# Altium PCB Telit-GPS-SL871-Module-V1.1.PcbDoc
Units mm, origin at the board's own origin, x right, y up, seen from the top; angles counter-clockwise.
Board outline 29.9 x 35 mm, 2 copper layers (Top Layer, Bottom Layer); 16 components, 19 nets, 61 pads, 1 vias.
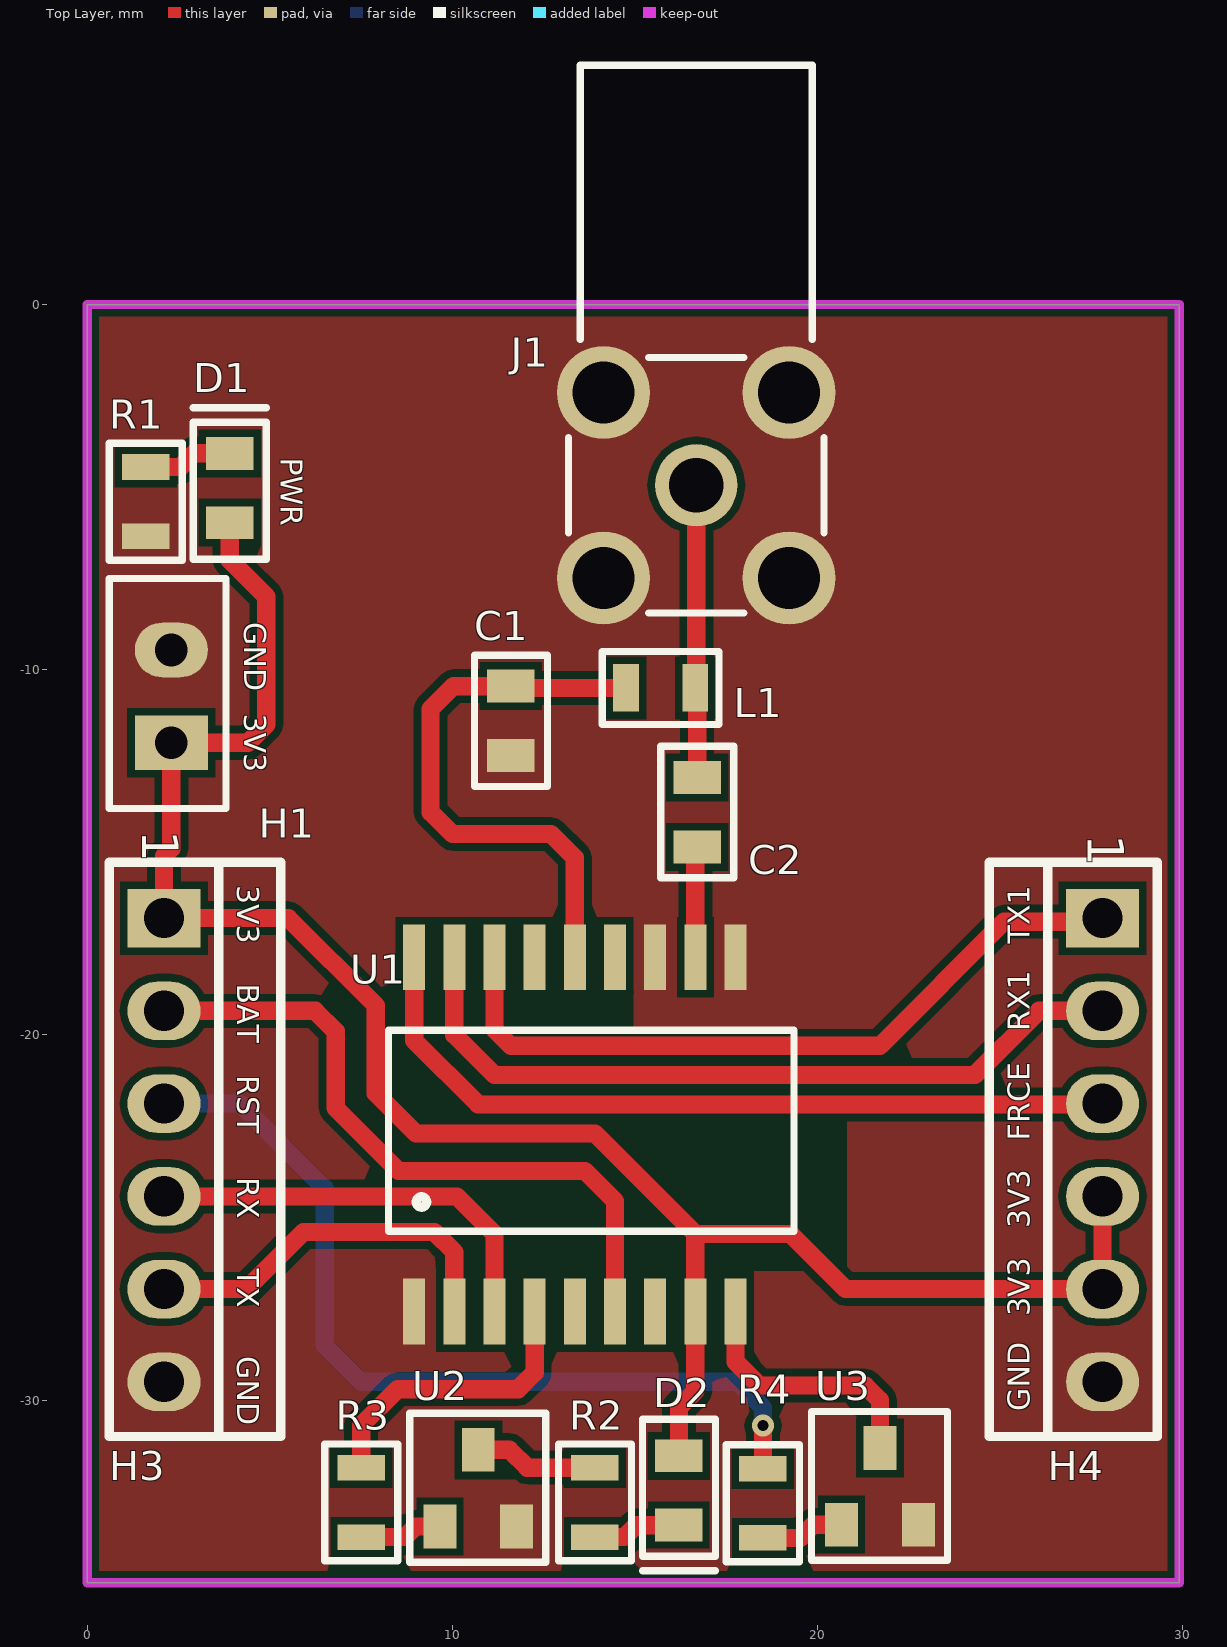
[diagram p0: Top Layer view]
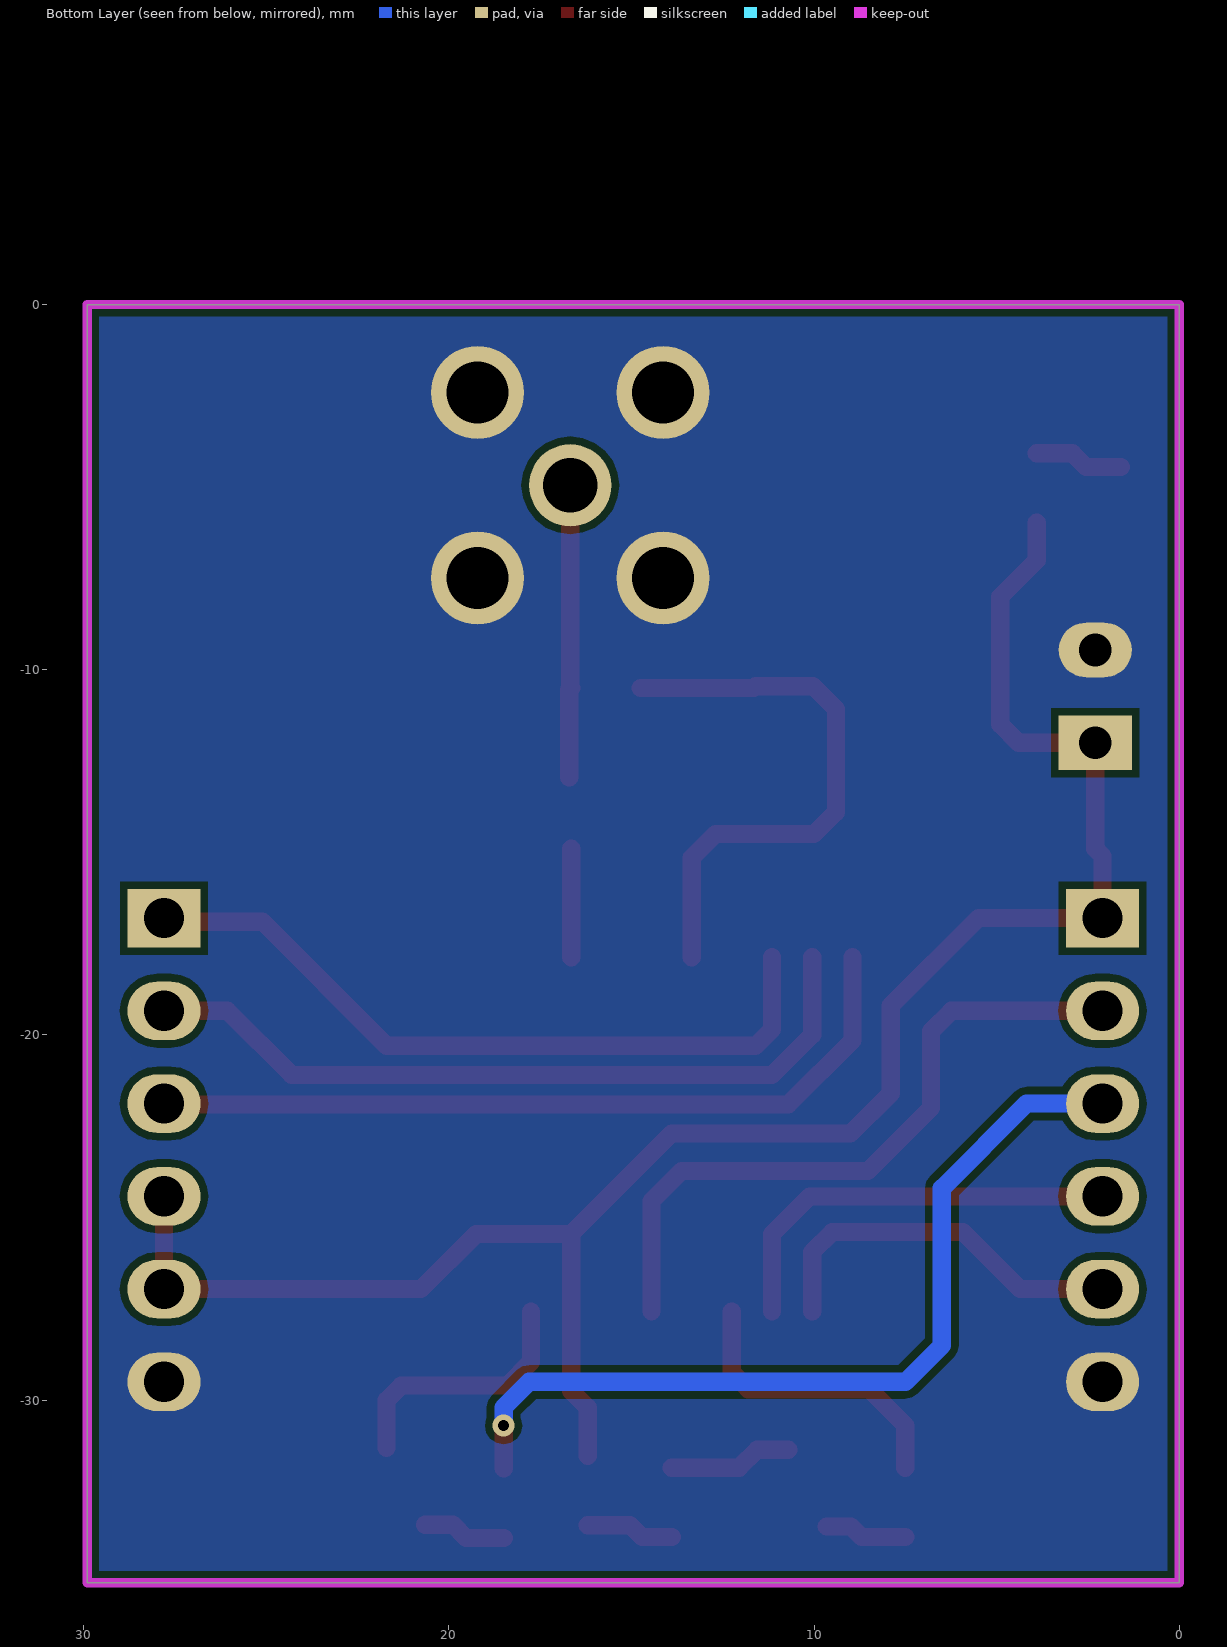
[diagram p1: Bottom Layer view, seen from below]

## Layer stack, top to bottom
Top Solder: solder mask 0.0102, Solder Resist, Dk 3.5
Top Layer: signal copper 0.0356
Dielectric 1: dielectric 0.32, FR-4, Dk 4.8
Bottom Layer: signal copper 0.0356
Bottom Solder: solder mask 0.0102, Solder Resist, Dk 3.5

## Board outline
0,0 29.9,0 29.9,-34.9 29.9,-35 0,-35

## Design rules (kind name [scope] priority, off if disabled: settings)
Clearance [All] p1: gap=0.2 ignorepadtopadclearanceinfootprint=FALSE
ComponentClearance [All] p1: gap=0.2 collisioncheckmode=3 verticalgap=0.2 showdistances=FALSE
HoleSize [All] p1: absolutevalues=TRUE maxlimit=4 minlimit=0.025 maxpercent=80.000 minpercent=20.000
HoleToHoleClearance [All] p1: gap=0.2 allowstackedmicrovias=TRUE
MinimumSolderMaskSliver [All] p1: minsoldermaskwidth=0.1
PlaneConnect [All] p1: planeconnectstyle=Direct reliefexpansion=0.508 reliefentries=4 reliefconductorwidth=0.254 reliefairgap=0.254
PolygonConnect [All] p1: connectstyle=Direct reliefconductorwidth=0.254 reliefentries=4 polygonreliefangle="90 Angle" airgapwidth=0.254
RoutingVias [All] p1: holewidth=0.3 width=0.6 viastyle="Through Hole" minholewidth=0.3 minwidth=0.6 maxholewidth=0.3 maxwidth=0.6
SilkToSilkClearance [All] p1: silktosilkclearance=0.1
SilkToSolderMaskClearance [IsPad] p1: minsilkscreentomaskgap=0.1 clearancetoexposedcopper=TRUE
SolderMaskExpansion [All] p1: expansion=0.1
Width [All] p1: maxlimit=0.5 minlimit=0.2 preferedwidth=0.3
23 further rules are at their usual default settings.

## Components (designator, comment, footprint, x,y, rotation, side; value= is the part's Value field where it differs from the comment)
C1 "33PF/10V/C0G/NP0" CAP0805 11.6,-11.4 r270 top
C2 "22PF/16V/C0G/NP0" CAP0805 16.7,-13.9 r90 top
D1 "RED" LED_0805 3.9,-5 r270 top
D2 "GREEN" LED_0805 16.2,-32.5 r90 top
H1 "2x1 Hdr" Hdr_Male_1x2_2.54mm 2.3,-12 r90 top
H3 "6x1 Hdr" Hdr_Female_1x6_2.54mm 2.1,-16.8 r0 top
H4 "6x1 Hdr" Hdr_Female_1x6_2.54mm 27.8,-16.8 r0 top
J1 "WR-SMA-THT" WR_SMA_THT_60311002114501 16.675,-4.95 r180 top
L1 "47nH" L0805 15.7,-10.5 r0 top
R1 "100R-1/8W" R0805 1.6,-5.4 r90 top
R2 "100R-1/8W" R0805 13.9,-32.8 r270 top
R3 "1k-1/8W" R0805 7.5,-32.8 r90 top
R4 "1k-1/8W" R0805 18.5,-32.825 r90 top
U1 "TELIT SL871" Telit_SL871 8.95,-27.575 r90 top
U2 "SBC846BLT1G" SOT-23 10.705,-32.412 r0 top
U3 "SBC846BLT1G" SOT-23 21.706,-32.362 r0 top

## Footprints (in the part's own frame and the unit in brackets; to place one, negate y for a bottom-side part, rotate by r counter-clockwise, add the part's x,y. Pads: shape width x height; smd on the part's side, far side on the other; paste and mask are expansions set on the pad)
CAP0805 [mm]
  rect 0.9x1.3 smd: 1(-0.95,0) 2(0.95,0)
  silkscreen extent -1.8,-1 1.8,1, body extent -1,-0.6 1,0.6, height 1.46
Hdr_Female_1x6_2.54mm [mm]
  rect 2x1.6 hole 1.1: 1(0,0)
  oval 2x1.6 hole 1.1: 2(0,-2.54) 3(0,-5.08) 4(0,-7.62) 5(0,-10.16) 6(0,-12.7)
  silkscreen extent -1.5,-14.2 1.5,1.52, body extent -1.25,-14.17 1.25,1.47, height 8.31
Hdr_Male_1x2_2.54mm [mm]
  rect 1.5x2 hole 0.9: 1(0,0)
  oval 1.5x2 hole 0.9: 2(2.54,0)
  silkscreen extent -1.8,-1.5 4.5,1.7, body extent -1.27,-1.27 3.81,1.27, height 9.5
L0805 [mm]
  rect 0.7x1.3 smd: 1(-0.95,0) 2(0.95,0)
  silkscreen extent -1.6,-1 1.6,1, body extent -1,-0.6 1,0.6, height 0.71
LED_0805 [mm]
  rect 0.9x1.3 smd: 1(0.975,0) 2(-0.925,0)
  silkscreen extent -2.17,-1 1.97,1, body extent -0.98,-0.45 1.08,0.46, height 0.85
R0805 [mm]
  rect 0.7x1.3 smd: 1(-0.95,0) 2(0.95,0)
  silkscreen extent -1.6,-1 1.6,1, body extent -1,-0.6 1,0.6, height 0.71
SOT-23 [mm]
  rect 0.9x1.2 smd mask+0.06: 1(-1.05,-1.05) 2(1.05,-1.05) 3(0,1.05)
  silkscreen extent -1.88,-2.03 1.85,2.05, body extent -1.42,-1.32 1.48,1.08, height 1.03
Telit_SL871 [mm]
  rect 1.8x0.6 smd: 1(0,0) 2(0,-1.1) 3(0,-2.2) 4(0,-3.3) 5(0,-4.4) 6(0,-5.5) 7(0,-6.6) 8(0,-7.7) 9(0,-8.8) 10(9.7,-8.8) 11(9.7,-7.7) 12(9.7,-6.6) 13(9.7,-5.5) 14(9.7,-4.4) 15(9.7,-3.3) 16(9.7,-2.2) 17(9.7,-1.1) 18(9.7,0)
  silkscreen extent 2.2,-10.4 7.7,0.7, body extent 0,-10.3 9.7,1.2, height 1.5
WR_SMA_THT_60311002114501 [mm] "SMA PCB THT Jack Right Angle"
  round 2.25 hole 1.5: 1(0,0)
  round 2.55 hole 1.7: 2(-2.54,2.54) 3(2.54,2.54) 4(2.54,-2.54) 5(-2.54,-2.54)
  silkscreen extent -3.5,-11.5 3.5,3.5, body extent -3.5,-11.5 3.5,3.5, height 9.7

## Part data
C1: library part 885012007003, "CAP CER 33PF 10V C0G/NP0 0805", Capacitance=33pF, Case/Package=0805, Case Code (Metric)=2012, Manufacturer="Wurth Electronics", Max Operating Temperature=125°C, Min Operating Temperature=-55°C, Supplier Part Number 1=732-7808-1-ND, Tolerance=5%, Voltage Rating=10V, Case Code (Imperial)=0805, Category=Capacitors, Length=0.079inch, Manufacturer Part Number=885012007003, Mount="Surface Mount", Packaging="Tape and Reel", Pricing 1="1 = 0,10000, 10 = 0,04100, 100 = 0,03690, 500 = 0,03262 (USD)", RoHS=Yes, Stock 1=2029, Supplier 1=Digi-Key, Thickness=0.028inch, Width=0.049inch
C2: library part 885012007012, "CAP CER 22PF 16V C0G/NP0 0805", Capacitance=22pF, Case/Package=0805, Case Code (Metric)=2012, Manufacturer="Wurth Electronics", Max Operating Temperature=125°C, Min Operating Temperature=-55°C, Supplier Part Number 1=732-7816-1-ND, Tolerance=5%, Voltage Rating=16V, Case Code (Imperial)=0805, Category=Capacitors, Length=0.079inch, Manufacturer Part Number=885012007012, Mount="Surface Mount", Packaging="Tape and Reel", Pricing 1="1 = 0,10000, 10 = 0,04300, 100 = 0,03830, 500 = 0,03390 (USD)", RoHS=Yes, Stock 1=22, Supplier 1=Digi-Key, Thickness=0.028inch, Width=0.049inch
D1: library part 150080RS75000, "LED, 0805, RED, 150MCD, 625NM", Case/Package=0805, Case Code (Metric)=2012, Color=Red, Forward Current=30mA, Forward Voltage=2V, Manufacturer="Wurth Electronics", Max Operating Temperature=85°C, Min Operating Temperature=-40°C, Package Quantity=4000, Supplier Part Number 1=732-4984-1-ND, Test Current=20mA, Case Code (Imperial)=0805, Category=Optoelectronics, ComponentLink1Description=http://www.farnell.com/datasheets/1911350.pdf?src-supplier=Element14, ComponentLink1URL=http://www.farnell.com/datasheets/1911350.pdf?src-supplier=Element14, ComponentLink2Description=http://www.produktinfo.conrad.com/datenblaetter/750000-774999/759435-da-01-en-CHIPLED_0805_W_KL_ROT_150080RS75000.pdf?src-supplier=Conrad, ComponentLink2URL=http://www.produktinfo.conrad.com/datenblaetter/750000-774999/759435-da-01-en-CHIPLED_0805_W_KL_ROT_150080RS75000.pdf?src-supplier=Conrad, Dominant Wavelength=625nm, Height=0.7mm, Length=2mm, Lens Style=Clear,Rectangular, Luminous Intensity=150mcd, Manufacturer Part Number=150080RS75000, Mount="Surface Mount", Packaging="Tape and Reel", Pricing 1="1 = 0,17000, 50 = 0,16000, 100 = 0,13700, 500 = 0,11800 (USD)", REACH SVHC=Unknown, RoHS=Yes, Stock 1=58016, Supplier 1=Digi-Key, Viewing Angle=140°, Wavelength=625nm, Width=1.25mm
D2: library part 150080VS75000, "LED, 0805, B GREEN, 40MCD, 570NM", Case/Package=0805, Case Code (Metric)=2012, Color=Green, Forward Current=30mA, Forward Voltage=2V, Manufacturer="Wurth Electronics", Max Operating Temperature=85°C, Min Operating Temperature=-40°C, Package Quantity=4000, Supplier Part Number 1=732-4986-1-ND, Test Current=20mA, Case Code (Imperial)=0805, Category=Optoelectronics, ComponentLink1Description=http://www.farnell.com/datasheets/1911352.pdf?src-supplier=Element14, ComponentLink1URL=http://www.farnell.com/datasheets/1911352.pdf?src-supplier=Element14, ComponentLink2Description=https://katalog.we-online.de/led/datasheet/150080VS75000.pdf?src-supplier=Digi-Key, ComponentLink2URL=https://katalog.we-online.de/led/datasheet/150080VS75000.pdf?src-supplier=Digi-Key, ComponentLink3Description=http://www.produktinfo.conrad.com/datenblaetter/750000-774999/759437-da-01-en-CHIPLED_0805_W_KL_H_GRUEN_150080VS7500.pdf?src-supplier=Conrad, ComponentLink3URL=http://www.produktinfo.conrad.com/datenblaetter/750000-774999/759437-da-01-en-CHIPLED_0805_W_KL_H_GRUEN_150080VS7500.pdf?src-supplier=Conrad, Dominant Wavelength=570nm, Height=0.7mm, Length=2mm, Lens Style=Clear,Rectangular, Luminous Intensity=40mcd, Manufacturer Part Number=150080VS75000, Mount="Surface Mount", Packaging="Tape and Reel", Pricing 1="1 = 0,17000, 50 = 0,16000, 100 = 0,13700, 500 = 0,11800 (USD)", REACH SVHC=Unknown, RoHS=Yes, Stock 1=80308, Supplier 1=Digi-Key, Viewing Angle=140°, Wavelength=570nm, Width=1.25mm
H1: library part 61300211121, "Connector, Vertical, Through Hole, Header, 2, 2.54 Mm", Color=Black, Current Rating=3A, Manufacturer="Wurth Electronics", Max Operating Temperature=125°C, Min Operating Temperature=-40°C, Supplier Part Number 1=732-5315-ND, Voltage Rating=250V, Category=Connectors, ComponentLink1Description=http://www.mouser.com/ds/2/445/6130xx11121-538006.pdf?src-supplier=Mouser, ComponentLink1URL=http://www.mouser.com/ds/2/445/6130xx11121-538006.pdf?src-supplier=Mouser, Connector Type="Male Pin", Contact Gender=Male, Contact Material="Copper,Copper Alloy", Contact Mating Length=0.236inch, Contact Plating=Gold, Gender=Male, Housing Material=PBT, Lead Free="Lead Free", Manufacturer Part Number=61300211121, Mount="Through Hole", Number of Contacts=2, Number of Positions=2, Number of Rows=1, Packaging=Bulk, Pitch=0.1inch, Pricing 1="1 = 0,13000, 10 = 0,10600, 25 = 0,08800, 50 = 0,07400, 100 = 0,06700, 1000 = 0,06100 (USD)", REACH SVHC=Unknown, RoHS=Yes, Stock 1=132528, Supplier 1=Digi-Key, Termination="Through Hole"
H3 H4: library part 61300611121, "Connector, Vertical, Through Hole, Header 6, 2.54 Mm", Color=Black, Current Rating=3A, Manufacturer="Wurth Electronics", Max Operating Temperature=125°C, Min Operating Temperature=-40°C, Supplier Part Number 1=732-5319-ND, Voltage Rating=250V, Category=Connectors, Connector Type="Male Pin", Contact Gender=Male, Contact Material="Copper,Copper Alloy", Contact Mating Length=0.236inch, Contact Plating=Gold, Gender=Male, Housing Material=PBT, Lead Free="Lead Free", Manufacturer Part Number=61300611121, Mount="Through Hole", Number of Contacts=6, Number of Positions=6, Number of Rows=1, Packaging=Bulk, Pitch=0.1inch, Pricing 1="1 = 0,33000, 10 = 0,27900, 25 = 0,23200, 50 = 0,19400, 100 = 0,17600, 1000 = 0,16000 (USD)", REACH SVHC=Unknown, RoHS=Yes, Stock 1=13513, Supplier 1=Digi-Key, Termination="Through Hole"
J1: library part 60311002114501, "WR-SMA SMA PCB THT Jack Right Angle", Frequency Range="DC~18 GHz", Manufacturer="Wurth Electronics", Operating Temperature="-65 to 165 degC", Category=Connectors, ComponentLink1Description=Manufacturer, ComponentLink1URL=http://www.we-online.de, ComponentLink2Description=Datasheet, ComponentLink2URL=https://katalog.we-online.de/em/datasheet/60311002114501.pdf, Connector Type=SMA, Gender=Jack, Impedance="50 Ohm", Manufacturer Part Number=60311002114501, Mounting Technology=THT, Orientation Type="Right Angle", Packaging=Tray, Part Number=60311002114501, Published Date="August 2018", Publisher="Wurth Elektronik"
L1: library part IND_0805, "IND 0805"
R1 R2: library part ERA6AEB101V, "RES SMD 100 OHM 0.1% 1/8W 0805", Case/Package=0805, Case Code (Metric)=2012, Manufacturer=Panasonic, Max Operating Temperature=155°C, Max Power Dissipation=125mW, Min Operating Temperature=-55°C, Package Quantity=1, Resistance=100R, Supplier Part Number 1=P100DACT-ND, Temperature Coefficient=25ppm/°C, Tolerance=0.1%, Voltage Rating=100V, Case Code (Imperial)=0805, Category=Resistor, ComponentLink1Description=https://www.alliedelec.com/m/d/b6b0537e86f421aa7f5975bb1d8f429a.pdf?src-supplier=Allied+Electronics, ComponentLink1URL=https://www.alliedelec.com/m/d/b6b0537e86f421aa7f5975bb1d8f429a.pdf?src-supplier=Allied+Electronics, ComponentLink2Description=http://www.farnell.com/datasheets/485442.pdf?src-supplier=Farnell, ComponentLink2URL=http://www.farnell.com/datasheets/485442.pdf?src-supplier=Farnell, ComponentLink3Description=http://www.farnell.com/datasheets/485442.pdf?src-supplier=Element14, ComponentLink3URL=http://www.farnell.com/datasheets/485442.pdf?src-supplier=Element14, ComponentLink4Description=http://industrial.panasonic.com/www-data/pdf/AOA0000/AOA0000CE26.pdf?src-supplier=Avnet+Europe, ComponentLink4URL=http://industrial.panasonic.com/www-data/pdf/AOA0000/AOA0000CE26.pdf?src-supplier=Avnet+Europe, ComponentLink5Description=http://www.mouser.com/ds/2/315/AOA0000CE26-32660.pdf?src-supplier=Mouser, ComponentLink5URL=http://www.mouser.com/ds/2/315/AOA0000CE26-32660.pdf?src-supplier=Mouser, ComponentLink6Description=https://www.distrelec.biz/Web/Downloads/_t/ds/ERA_eng_tds.pdf?mime=application%2Fpdf&src-supplier=Distrelec, ComponentLink6URL=https://www.distrelec.biz/Web/Downloads/_t/ds/ERA_eng_tds.pdf?mime=application%2Fpdf&src-supplier=Distrelec, ComponentLink7Description=http://industrial.panasonic.com/www-data/pdf/AOA0000/AOA0000CE26.pdf?src-supplier=Future+Electronics, ComponentLink7URL=http://industrial.panasonic.com/www-data/pdf/AOA0000/AOA0000CE26.pdf?src-supplier=Future+Electronics, ComponentLink8Description=http://industrial.panasonic.com/www-data/pdf/AOA0000/AOA0000CE26.pdf?src-supplier=Avnet, ComponentLink8URL=http://industrial.panasonic.com/www-data/pdf/AOA0000/AOA0000CE26.pdf?src-supplier=Avnet, ComponentLink9Description=http://uk.rs-online.com/webdocs/0bee/0900766b80beefcc.pdf?src-supplier=RSComponents, ComponentLink9URL=http://uk.rs-online.com/webdocs/0bee/0900766b80beefcc.pdf?src-supplier=RSComponents, ComponentLink10Description=https://produktinfo.conrad.com/datenblaetter/450000-474999/452698-da-01-en-WIDERSTAND_0805_ERA.pdf?src-supplier=Conrad, ComponentLink10URL=https://produktinfo.conrad.com/datenblaetter/450000-474999/452698-da-01-en-WIDERSTAND_0805_ERA.pdf?src-supplier=Conrad, Composition="Metal Film,Thin Film", Contact Plating=Tin, Depth=1.25mm, Features="Automotive AEC-Q200", Height=0.5mm, Lead Free="Lead Free", Length=2mm, Manufacturer Part Number=ERA6AEB101V, Military Standard=Not, Mount="Surface Mount", Number of Pins=2, Number of Terminations=2, Packaging="Tape and Reel", Power Rating=125mW, Pricing 1="1 = 0,36000, 10 = 0,30200, 100 = 0,11820, 1000 = 0,04948, 2500 = 0,04536 (USD)", Radiation Hardening=No, REACH SVHC="No SVHC", RoHS=Yes, Stock 1=384718, Supplier 1=Digi-Key, Termination=SMD/SMT, Voltage Rating (DC)=100V, Width=1.25mm
R3 R4: library part ERA-6AED102V, "Res Thin Film 0805 1K Ohm 0.5% 0.125W(1/8W) ±25ppm/C Molded SMD Automotive Punched T/R", Case/Package=0805, Case Code (Metric)=2012, Manufacturer=Panasonic, Max Operating Temperature=155°C, Min Operating Temperature=-55°C, Package Quantity=5000, Power Rating=125mW, Resistance=1kR, Supplier Part Number 1=P123793CT-ND, Temperature Coefficient=25ppm/°C, Tolerance=0.5%, Voltage Rating=100V, Case Code (Imperial)=0805, Category=Resistor, ComponentLink1Description=http://industrial.panasonic.com/www-data/pdf/AOA0000/AOA0000CE26.pdf?src-supplier=Avnet, ComponentLink1URL=http://industrial.panasonic.com/www-data/pdf/AOA0000/AOA0000CE26.pdf?src-supplier=Avnet, Composition="Thin Film", Contact Plating=Tin, Depth=1.25mm, Height=0.5mm, Lead Free="Lead Free", Length=2mm, Manufacturer Part Number=ERA-6AED102V, Military Standard=Not, Mount="Surface Mount", Packaging="Tape and Reel", Pricing 1="1 = 0,12000, 10 = 0,10900, 25 = 0,07520, 50 = 0,05860, 100 = 0,04180, 250 = 0,03260, 500 = 0,02592, 1000 = 0,01839 (USD)", RoHS=Yes, Stock 1=20040, Supplier 1=Digi-Key, Width=1.25mm
U1: "Telit GNSS MODULE", Manufacturer=Telit, Category=GSM/GPS, Manufacturer Part Number="TELIT SL871"
U2 U3: "BC846 NPN 65V 0.1A SOT-23", Current - Collector Cutoff (Max)="15nA (ICBO)", DC Current Gain (hFE) (Min) @ Ic, Vce="200 @ 2mA, 5V", Frequency - Transition=100MHz, Manufacturer="ON Semiconductor", Operating Temperature="-55°C ~ 150°C (TJ)", Package / Case="TO-236-3, SC-59, SOT-23-3", Supplier Device Package="SOT-23-3 (TO-236)", Supplier Part Number 1=SBC846BLT1GOSCT-ND, Category="Discrete Semiconductor Products", ComponentLink1Description=http://www.onsemi.com/pub/Collateral/BC846ALT1-D.PDF, ComponentLink1URL=http://www.onsemi.com/pub/Collateral/BC846ALT1-D.PDF, Manufacturer Part Number=SBC846BLT1G, Mounting Type="Surface Mount", Packaging="Cut Tape (CT)", Part Status=Active, Pricing 1="1=0.31, 10=0.256, 100=0.1356, 500=0.08922, 1000=0.06067 (USD)", RoHS="RoHS Compliant", Stock 1=23802, Supplier 1=Digi-Key, Transistor Type=NPN, Vce Saturation (Max) @ Ib, Ic="600mV @ 5mA, 100mA"

## Via types
v1: diameter 0.6, hole 0.3, Top Layer to Bottom Layer, 1 vias

## Nets (pads, with @x,y where several pads share a name; then routed paths per layer and width w, separated by ;. In a path a pad name is that pad's centre, name@x,y a point inside that pad or via, vN(x,y) a via of type N, cw(c..) or ccw(c..) an arc to the next point about the centre after c; other vN are vias at no path point)
3V3: D1.1 D2.1 H1.1 H3.1 H4.4 H4.5 U1.8 | length 53.7
  Top Layer w0.5: D1.1 3.9,-7 4.9,-8 4.9,-11.5 4.4,-12 H1.1 2.3,-14.9 2.1,-15.1 H3.1 5.5,-16.8 7.9,-19.2 7.9,-21.6 9,-22.7 13.9,-22.7 16.65,-25.45 ; D2.1 16.2,-30.2 16.65,-29.75 U1.8 16.65,-25.45 ; H4.4 H4.5 20.76,-26.96 19.25,-25.45 16.65,-25.45
!RST: H3.3 R4.2 | length 24
  Top Layer w0.5: R4.2 v1(18.5,-30.7)
  Bottom Layer w0.5: H3.3 4.18,-21.88 6.5,-24.2 6.5,-28.5 7.5,-29.5 17.8,-29.5 18.5,-30.2 v1(18.5,-30.7)
FORCE_ON: H4.3 U1.18 | length 21.9
  Top Layer w0.254: H4.3@27.772,-21.908 H4.3
  Top Layer w0.5: U1.18 8.95,-20.15 10.708,-21.908 H4.3@27.772,-21.908
GND: C1.2 H1.2 H3.6 H4.6 J1.2 J1.3 J1.4 J1.5 R1.1 U1.1 U1.10 U1.12 U2.2 U3.2
NetC2_1: C2.1 U1.11 | length 3
  Top Layer w0.254: C2.1@16.65,-14.9 C2.1
  Top Layer w0.5: U1.11 C2.1@16.65,-14.9
NetC2_2: C2.2 J1.1 L1.2 | length 8
  Top Layer w0.5: J1.1 16.675,-10.475 L1.2 16.7,-10.55 C2.2
NetD1_2: D1.2 R1.2 | length 2.5
  Top Layer w0.5: R1.2 2.55,-4.45 2.925,-4.075 D1.2
NetD2_2: D2.2 R2.2 | length 2.4
  Top Layer w0.5: R2.2 14.712,-33.75 15.037,-33.425 D2.2
NetR2_1: R2.1 U2.3 | length 3.4
  Top Layer w0.5: U2.3 11.562,-31.362 12.05,-31.85 R2.1
NetR3_1: R3.1 U2.1 | length 2.3
  Top Layer w0.5: R3.1 8.7,-33.75 8.988,-33.462 U2.1
NetR4_1: R4.1 U3.1 | length 2.3
  Top Layer w0.5: R4.1 19.525,-33.775 19.888,-33.412 U3.1
PPS: R3.2 U1.4 | length 8.2
  Top Layer w0.5: R3.2 7.5,-30.7 8.5,-29.7 11.8,-29.7 12.25,-29.25 U1.4
RST: U1.9 U3.3 | length 7.1
  Top Layer w0.5: U1.9 17.75,-28.95 18.4,-29.6 21.3,-29.6 21.706,-30.006 U3.3
RX: H3.4 U1.3 | length 11.6
  Top Layer w0.5: H3.4 2.1,-24.425 10.125,-24.425 11.15,-25.45 U1.3
RX1: H4.2 U1.17 | length 21.1
  Top Layer w0.5: U1.17 10.05,-20 11.15,-21.1 24.3,-21.1 26.06,-19.34 H4.2
TX: H3.5 U1.2 | length 10.4
  Top Layer w0.5: H3.5 4.36,-26.96 5.92,-25.4 9.5,-25.4 10.05,-25.95 U1.2
TX1: H4.1 U1.16 | length 20.3
  Top Layer w0.254: H4.1@27.8,-16.9 H4.1
  Top Layer w0.5: U1.16 11.15,-19.85 11.6,-20.3 21.7,-20.3 25.1,-16.9 H4.1@27.8,-16.9
VBAT: H3.2 U1.6 | length 18.8
  Top Layer w0.5: H3.2 6.24,-19.34 6.8,-19.9 6.8,-22 8.525,-23.725 13.625,-23.725 14.45,-24.55 U1.6
VCC_RF: C1.1 L1.1 U1.14 | length 15.6
  Top Layer w0.5: U1.14 13.35,-15.15 12.7,-14.5 10,-14.5 9.4,-13.9 9.4,-11.076 10.026,-10.45 C1.1 11.65,-10.5 L1.1
pads on no net: U1.5 U1.7 U1.13 U1.15

## Polygon pours and split planes (outlines as drawn)
GND on Bottom Layer "BOTTOM-GND" (solid, pour order 2): 0.1,-0.1 0.1,-34.9 29.8,-34.9 29.8,-0.1
GND on Top Layer "TOP-GND" (solid, pour order 4): 0.15,-0.1 0.15,-34.9 29.85,-34.9 29.85,-0.1

## Keep-outs
Keep-Out Layer:
  lines w0.254: 0,-35 0,0 29.9,0 29.9,-35 0,-35

## Other copper
Top Layer:
  pour cut-out: 14.45,-21.5 20.8,-21.5 20.8,-26.351 20.905,-26.456 14.456,-26.456 14.4,-26.4
  pour cut-out: 14.95,-18.975 14.95,-19.9 11.562,-19.9 11.562,-18.9 14.869,-18.9 14.969,-18.8
  pour cut-out: 10.4,-23.725 14.175,-23.725 14.25,-23.8 14.25,-26.7 10.5,-26.7 10.4,-26.6

## Silkscreen, mask and mechanical layers (free items; w line width, h text height)
Top Overlay:
  lines w0.254: 3.6,-31 5.3,-31 5.3,-15.276 3.6,-15.276 ; 26.3,-31 24.7,-31 24.7,-15.276 26.3,-15.276
  text "PWR" at 5.3,-4.2 h0.6 r270
  text "GND" at 4.3,-8.7 h0.6 r270
  text "3V3" at 4.3,-11.2 h0.6 r270
  text "3V3" at 4.1,-15.9 h0.6 r270
  text "TX1" at 25.8,-17.5 h0.6 r90
  text "BAT" at 4.1,-18.6 h0.6 r270
  text "RX1" at 25.8,-19.9 h0.6 r90
  text "RST" at 4.1,-21.1 h0.6 r270
  text "FRCE" at 25.8,-22.9 h0.6 r90
  text "RX" at 4.1,-23.9 h0.6 r270
  text "3V3" at 25.8,-25.3 h0.6 r90
  text "TX" at 4.1,-26.4 h0.6 r270
  text "3V3" at 25.8,-27.7 h0.6 r90
  text "GND" at 4.1,-28.8 h0.6 r270
  text "GND" at 25.8,-30.3 h0.6 r90

## Dimensions
0,-35 to 29.9,-34.9 on Mechanical 15
29.9,-34.9 to 29.9,0 on Mechanical 15

## Text inside footprints (layer, text, board x,y; h text height)
H3: Top Overlay "1" at 1.5,-14.4 h1 r270
H4: Top Overlay "1" at 27.4,-14.5 h1 r270